# Altium PCB HUB75onQSPI.PcbDoc
Units mm, origin at the board's own origin, x right, y up, seen from the top; angles counter-clockwise.
Board outline 65.8 x 54.77 mm, 2 copper layers (Top Layer, Bottom Layer), stack 1.571 mm thick; 44 components, 37 nets, 239 pads, 38 vias.
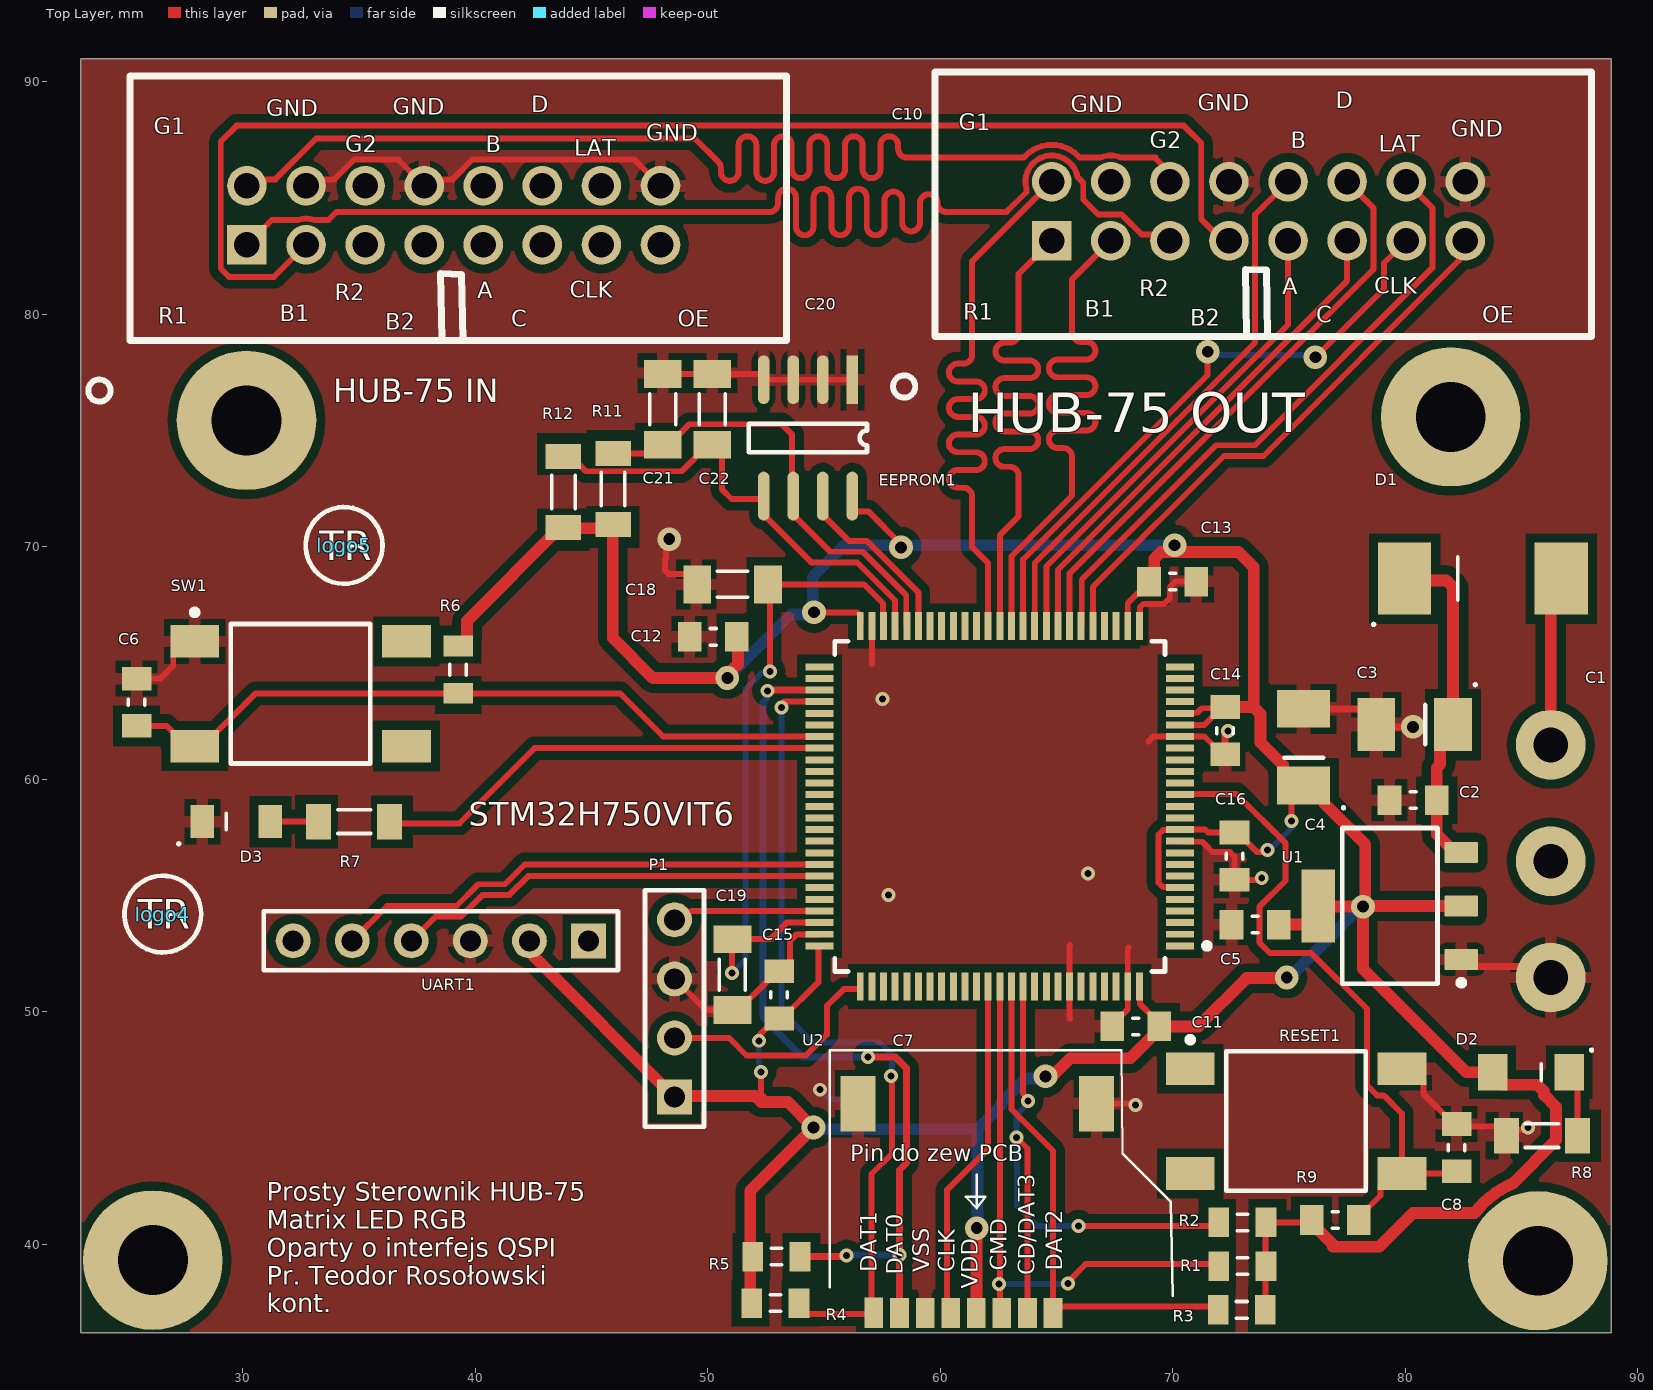
[diagram p0: Top Layer view]
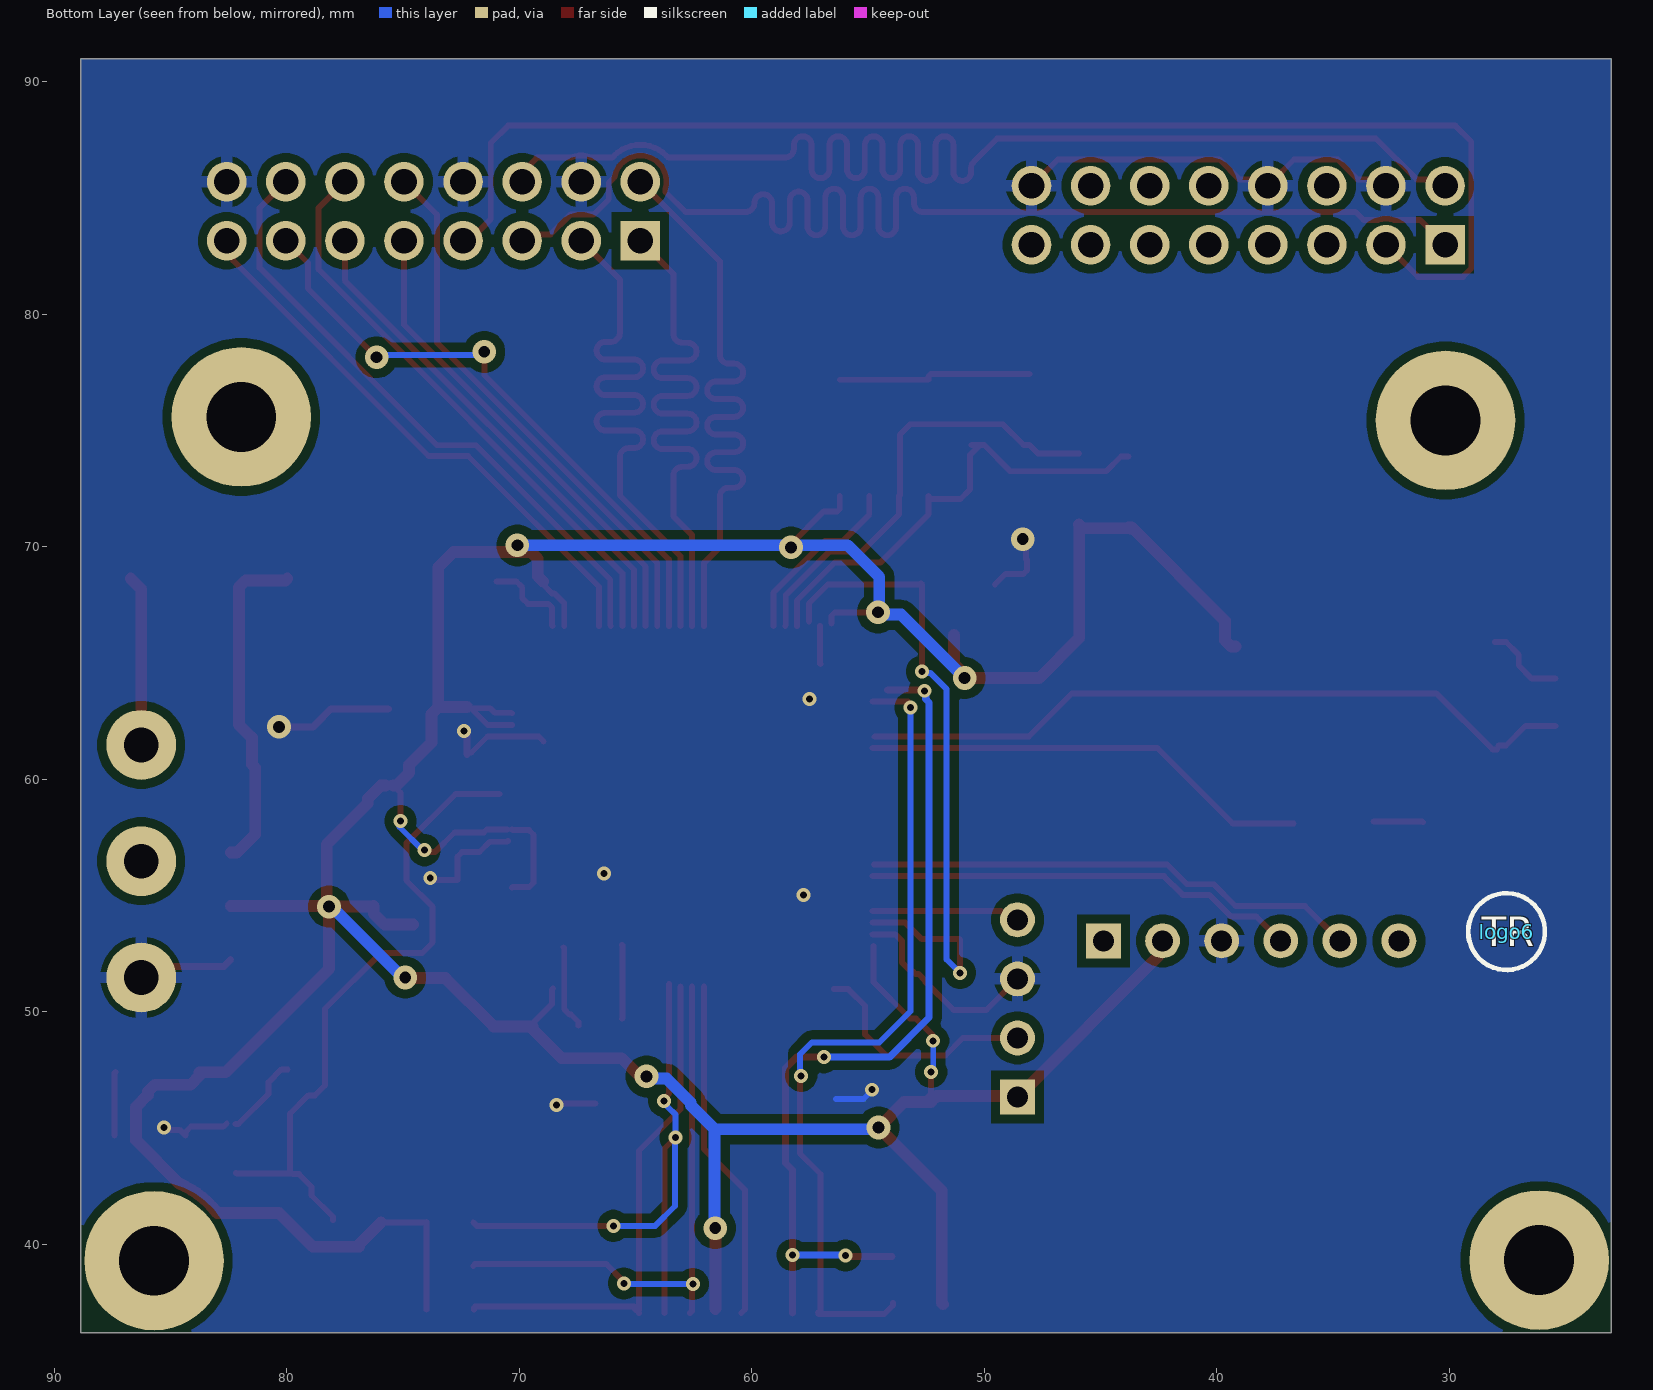
[diagram p1: Bottom Layer view, seen from below]
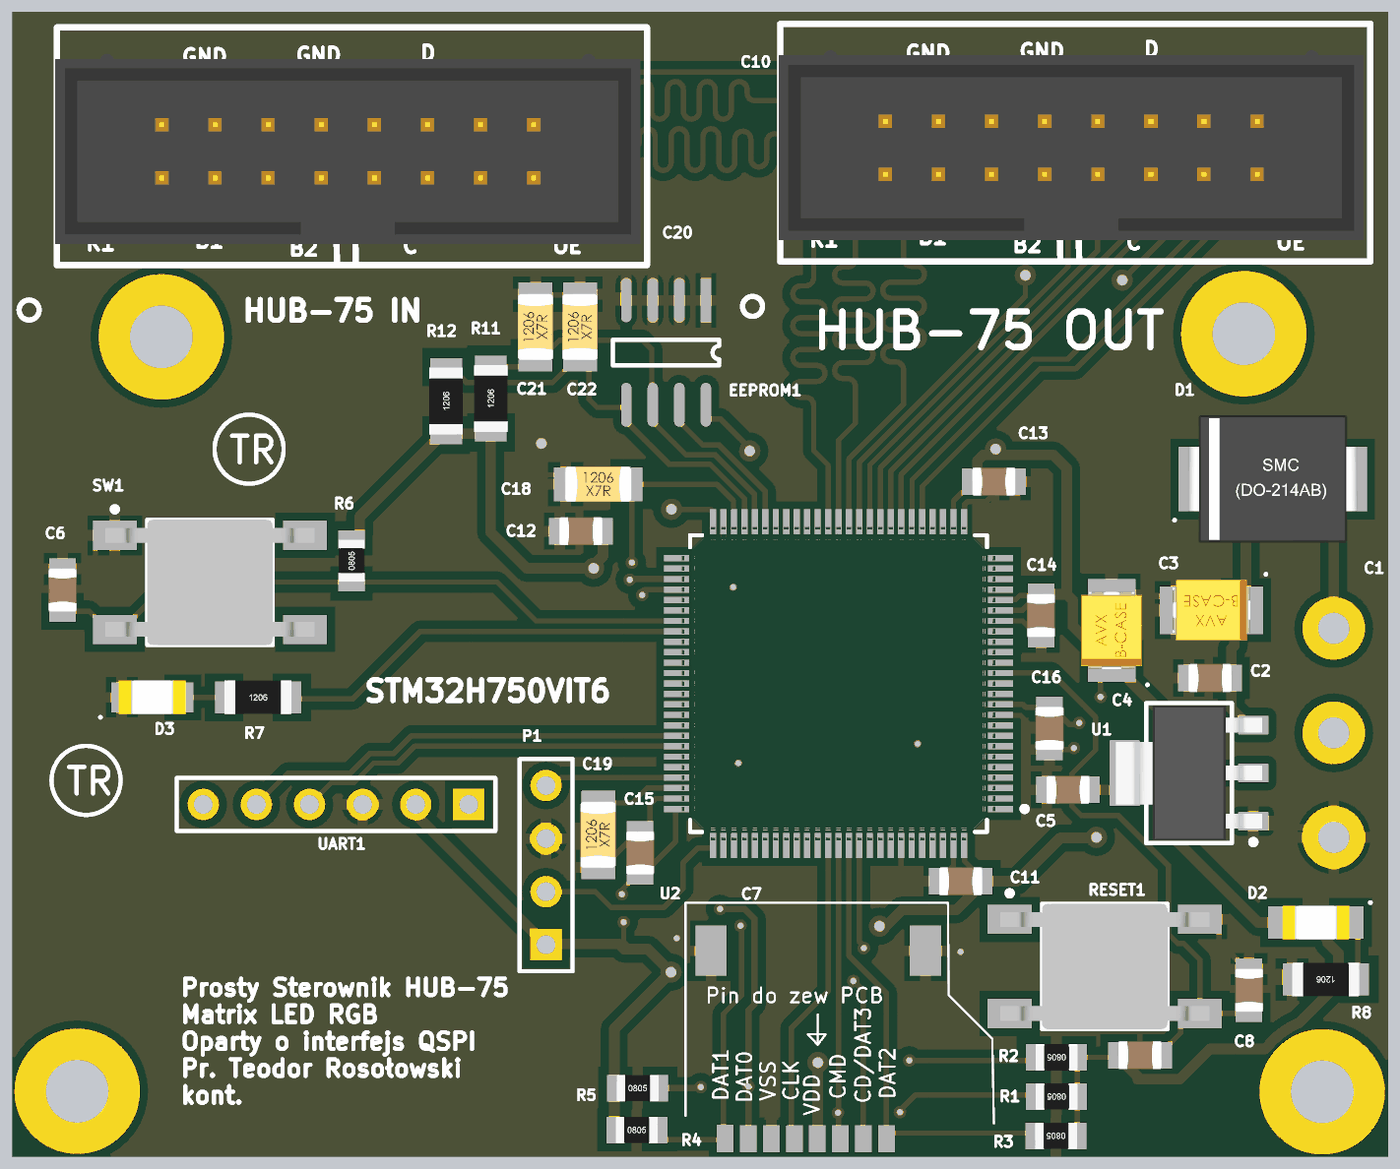
[diagram p2: 3D render of the assembled board from above, using the file's embedded part models]

## Layer stack, top to bottom
Top Solder: solder mask 0.0102, Solder Resist, Dk 3.5
Top Layer: signal copper 0.0356
Dielectric1: core 1.5, FR-4, Dk 4.8
Bottom Layer: signal copper 0.0356
Bottom Solder: solder mask 0.0102, Solder Resist, Dk 3.5

## Board outline
23.05,36.2 23.05,90.975 88.85,90.975 88.85,36.2

## Design rules (kind name [scope] priority, off if disabled: settings)
AssemblyTestPointUsage [All] p1 off:
AssemblyTestpoint [All] p1 off: testpointundercomponent=TRUE minsize=1.016 maxsize=2.54 preferedsize=1.524 minholesize=0 maxholesize=1.016 preferedholesize=0.813 testpointgrid=0.025 usegrid=TRUE gridtolerance=0 allowsidetop=TRUE allowsidebottom=TRUE
Clearance Keep-Out [OnLayer('Keep-Out Layer')] p1: gap=0.406 ignorepadtopadclearanceinfootprint=FALSE except(0: Arc-Hole Track-Hole SMDPad-Hole THPad-Hole Via-Hole Fill-Hole Poly-Hole Region-Hole Text-Hole)
Clearance VIA-PAD [IsVIA vs IsPAD] p2: gap=0.152 ignorepadtopadclearanceinfootprint=FALSE except(0: Arc-Hole Track-Hole SMDPad-Hole THPad-Hole Via-Hole Fill-Hole Poly-Hole Region-Hole Text-Hole)
Clearance Clearance_REF [HasFootprint('Designator_blacking') or HasFootprint('Designator')] p3: gap=0.203 ignorepadtopadclearanceinfootprint=FALSE except(0: Arc-Hole Track-Hole SMDPad-Hole THPad-Hole Via-Hole Fill-Hole Poly-Hole Region-Hole Text-Hole)
Clearance Clearance_REF60 [HasFootprint('Designator_60_blacking') or HasFootprint('Designator_60')] p4: gap=0.381 ignorepadtopadclearanceinfootprint=FALSE except(0: Arc-Hole Track-Hole SMDPad-Hole THPad-Hole Via-Hole Fill-Hole Poly-Hole Region-Hole Text-Hole)
Clearance Clearance_28mil [HasFootprint('SFT01')] p5: gap=0.711 ignorepadtopadclearanceinfootprint=FALSE except(0: Arc-Hole Track-Hole SMDPad-Hole THPad-Hole Via-Hole Fill-Hole Poly-Hole Region-Hole Text-Hole)
Clearance Clearance_26mil [HasFootprint('SW-2') or HasFootprint('SW-4') or HasFootprint('SW-6') or HasFootprint('SW-8')] p6: gap=0.66 ignorepadtopadclearanceinfootprint=FALSE except(0: Arc-Hole Track-Hole SMDPad-Hole THPad-Hole Via-Hole Fill-Hole Poly-Hole Region-Hole Text-Hole)
Clearance Clearance_20mil [HasFootprint('NXW-02SMD') or HasFootprint('NXW-03SMD') or HasFootprint('NXW-04SMD') or HasFootprint('NXW-05SMD') or HasFootprint('NXW-06SMD') or HasFootprint('NXW-08SMD') or HasFootprint('NXW-10SMD') or HasFootprint('NXW-12SMD') or HasFootprint('GK2X5D_SMD_(PBMTD10S)')or HasFootprint('WE-PD2SA')   or HasFootprint('LK2X10E_SMD_(BHT20S)')] p7: gap=0.508 ignorepadtopadclearanceinfootprint=FALSE except(0: Arc-Hole Track-Hole SMDPad-Hole THPad-Hole Via-Hole Fill-Hole Poly-Hole Region-Hole Text-Hole)
Clearance Clearance_7.68mil [HasFootprint('TQFP64') vs IsPad] p8: gap=0.195 ignorepadtopadclearanceinfootprint=FALSE except(0: Arc-Hole Track-Hole SMDPad-Hole THPad-Hole Via-Hole Fill-Hole Poly-Hole Region-Hole Text-Hole)
Clearance InPolygon [InPolygon] p9: gap=0.381 ignorepadtopadclearanceinfootprint=FALSE except(0: Arc-Hole Track-Hole SMDPad-Hole THPad-Hole Via-Hole Fill-Hole Poly-Hole Region-Hole Text-Hole)
Clearance [All] p10: gap=0.203 ignorepadtopadclearanceinfootprint=FALSE except(0: Arc-Hole Track-Hole SMDPad-Hole THPad-Hole Via-Hole Fill-Hole Poly-Hole Region-Hole Text-Hole; 0.15: Arc-THPad Track-THPad SMDPad-THPad THPad-THPad; 0.2: Arc-SMDPad Track-SMDPad SMDPad-SMDPad)
ComponentClearance [All] p1: gap=0 collisioncheckmode=3 verticalgap=0 showdistances=FALSE
FabricationTestPointUsage [All] p1 off: valid=0 allowmultiple=FALSE
FabricationTestpoint [All] p1 off: side=3 testpointundercomponent=TRUE minsize=1.016 maxsize=2.54 preferedsize=1.524 minholesize=0 maxholesize=1.016 preferedholesize=0.813 testpointgrid=0.025 allowsidetop=TRUE allowsidebottom=TRUE usegrid=TRUE gridtolerance=0
HoleSize HoleSize_Ramka [HasFootprint('hole_frame') or HasFootprint('hole_frame1')] p1: absolutevalues=TRUE maxlimit=3 minlimit=3 maxpercent=80.000 minpercent=20.000
HoleSize [All] p2: absolutevalues=TRUE maxlimit=5 minlimit=0.3 maxpercent=80.000 minpercent=20.000
MatchedLengths "Schematic Matched Net Lengths_1" [InNetClass('DAT_RGB_OUT')] p1: tolerance=2 checknetsindiffpair=FALSE checkdiffpairvsdiffpair=TRUE checkxsignals=TRUE checkothers=TRUE
MatchedLengths "Schematic Matched Net Lengths" [InNetClass('DAT_RGB')] p2: tolerance=2 checknetsindiffpair=FALSE checkdiffpairvsdiffpair=TRUE checkxsignals=TRUE checkothers=TRUE
MatchedLengths Lengh [InNetClass('DAT_RGB')  And  InNetClass('DAT_RGB_OUT')] p3: tolerance=2 checknetsindiffpair=FALSE checkdiffpairvsdiffpair=TRUE checkxsignals=TRUE checkothers=TRUE
MinimumSolderMaskSliver MinimumSolderMaskSliver_Ramka [HasFootprint('LOGO-05X18_so')] p1: minsoldermaskwidth=0
MinimumSolderMaskSliver MinimumSolderMaskSliver_Via-Pad [IsVia vs IsPad] p2: minsoldermaskwidth=0.508
MinimumSolderMaskSliver [All] p3: minsoldermaskwidth=0.095
PolygonConnect PolygonConnect_VIA [ISVIA] p1: connectstyle=Direct reliefconductorwidth=0.254 reliefentries=4 polygonreliefangle="90 Angle" airgapwidth=0.254
PolygonConnect PolygonConnect_30mil [HasFootprint('CE-SMD-J80_(H7,9MM)')] p2: connectstyle=Relief reliefconductorwidth=0.762 reliefentries=4 polygonreliefangle="90 Angle" airgapwidth=0.254
PolygonConnect PolygonConnect_24mil [HasFootprint('3528-SMDB') or HasFootprint('6032-SMDC') or HasFootprint('7343-SMDD')] p3: connectstyle=Relief reliefconductorwidth=0.61 reliefentries=4 polygonreliefangle="90 Angle" airgapwidth=0.254
PolygonConnect PolygonConnect_20mil [HasFootprint('0805R') or HasFootprint('0805C')or HasFootprint('1206R') or HasFootprint('1206C')] p4: connectstyle=Relief reliefconductorwidth=0.508 reliefentries=4 polygonreliefangle="90 Angle" airgapwidth=0.254
PolygonConnect PolygonConnect_16mil [HasFootprint('CF2040_V_(ZIF40-0,5MM)')] p5: connectstyle=Relief reliefconductorwidth=0.406 reliefentries=4 polygonreliefangle="90 Angle" airgapwidth=0.254
PolygonConnect PolygonConnect_14mil [HasFootprint('SOODIM-200_(TYCO,CONCRAFT 2,5V)') or HasFootprint('SOODIM-200_(TYCO,CONCRAFT 2,5V) - COLIBRI') or HasFootprint('TSSOP24') or HasFootprint('TSSOP20') or HasFootprint('TSSOP18') or HasFootprint('TSSOP16') or HasFootprint('TSSOP14') or HasFootprint('SSOP24-150-0.64') or HasFootprint('SOT-323-5')] p6: connectstyle=Relief reliefconductorwidth=0.356 reliefentries=4 polygonreliefangle="90 Angle" airgapwidth=0.254
PolygonConnect PolygonConnect_12mil [HasFootprint('CF2014_D_(ZIF14-0,5MM)') or HasFootprint('CF2040_U_(ODWROTNA NUMERACJA)') or HasFootprint('TQFP144') or HasFootprint('TQFP80') or HasFootprint('TQFP64') or HasFootprint('TQFP48') or HasFootprint('0603C') or HasFootprint('0603R') or HasFootprint('SOT-23-3') or HasFootprint('4D03')or HasFootprint('QFN16-0.65_(H1,6MM)')or HasFootprint('PLCC2') or HasFootprint('PLCC2-S')or HasFootprint('SFH5711')] p7: connectstyle=Relief reliefconductorwidth=0.305 reliefentries=4 polygonreliefangle="90 Angle" airgapwidth=0.254
PolygonConnect PolygonConnect_11mil [HasFootprint('QFN20_B&T') or HasFootprint('QFN24_B&T') or HasFootprint('QFN32_31_B&T') or HasFootprint('QFN32_34_B&T') or HasFootprint('QFN36_30x40_LT3958_B&T') or HasFootprint('QFN36_37_B&T') or HasFootprint('QFN36_44_B&T') or HasFootprint('QFN40_41_B&T') or HasFootprint('QFN40_44_B&T_1')or HasFootprint('QFN56_59_B&T')] p8: connectstyle=Relief reliefconductorwidth=0.279 reliefentries=4 polygonreliefangle="90 Angle" airgapwidth=0.254
PolygonConnect PolygonConnect_13mil [HasFootprint('QFN12-0.80_21_B&T') or HasFootprint('QFN16-0.65_21_B&T')] p9: connectstyle=Relief reliefconductorwidth=0.33 reliefentries=4 polygonreliefangle="90 Angle" airgapwidth=0.254
PolygonConnect PolygonConnect_10mil [HasFootprint('D0603') or HasFootprint('0402') or HasFootprint('D0603R') or HasFootprint('D0603G') or HasFootprint('D0603B') or HasFootprint('D0603Y') or HasFootprint('0402R') or HasFootprint('0402C')] p10: connectstyle=Relief reliefconductorwidth=0.254 reliefentries=4 polygonreliefangle="90 Angle" airgapwidth=0.254
PolygonConnect PolygonConnect_NoConnect [HasFootprint('SFT01') or HasFootprint('SW-2') or HasFootprint('SW-4') or HasFootprint('SW-6') or HasFootprint('SW-8') or HasFootprint('SOT-223') or HasFootprint('SOT-223_')] p11: connectstyle=NoConnect reliefconductorwidth=0.381 reliefentries=4 polygonreliefangle="90 Angle" airgapwidth=0.254
PolygonConnect [All] p12: connectstyle=Relief reliefconductorwidth=0.508 reliefentries=4 polygonreliefangle="90 Angle" airgapwidth=0.254
RoutingVias [All] p1: holewidth=0.508 width=1.016 viastyle="Through Hole" minholewidth=0.3 minwidth=0.6 maxholewidth=3 maxwidth=4
SilkToSilkClearance [All] p1: silktosilkclearance=0.025
SilkToSolderMaskClearance SilkscreenOverComponentPads [IsPad] p1: minsilkscreentomaskgap=0.152 clearancetoexposedcopper=TRUE
SolderMaskExpansion [All] p1: expansion=0.025 istentingtop=FALSE
Width Width_Ramka [HasFootprint('hole_frame') or HasFootprint('hole_frame1') or HasFootprint('Designator_blacking_B&T1') or HasFootprint('Designator_blacking_B&T2') or HasFootprint('Designator_blacking_B&T3') or HasFootprint('Designator_blacking_B&T4') or HasFootprint('Designator_blacking_B&T5')] p1: maxlimit=2.6 minlimit=0.254 preferedwidth=0.254
Width [All] p2: maxlimit=2.54 minlimit=0.203 preferedwidth=0.254
21 further rules are at their usual default settings.

## Classes and differential pairs
net class DAT_RGB: QSPI_CLK QSPI_D0 QSPI_D1 QSPI_D2
net class DAT_RGB_OUT: B1_OUT G1_OUT R1_OUT

## Components (designator, comment, footprint, x,y, rotation, side; value= is the part's Value field where it differs from the comment)
C1 "Złącze ARK 3Pin 5mm" ARK_3pin_5MM 86.25,61.475 r270 top
C2 "100n" 0805C 81.35,59.1 r180 top
C3 "47u-10V" 3528-SMDB 82.052,62.35 r180 top
C4 "47u-10V" 3528-SMDB 75.625,59.725 r90 top
C5 "100n" 0805C 74.558,53.75 r180 top
C6 "100n" 0805C 25.45,62.293 r90 top
C7 "Wtyk_uSD" 112K-TAA0-RA1 61.595,41.55 r0 top locked
C8 "100n" 0805C 82.2,43.143 r90 top
C10 "RGB_PANEL_CONN" RGB_MATRIX_LED_CONNECTOR 64.795,83.15 r0 top locked
C11 "100n" 0805C 69.425,49.375 r180 top
C12 "100n" 0805C 51.257,66.125 r180 top
C13 "100n" 0805C 68.975,68.5 r0 top
C14 "100n" 0805C 72.25,63.107 r270 top
C15 "100n" 0805C 53.073,49.713 r90 top
C16 "100n" 0805C 72.653,57.707 r270 top
C18 "2.2uF" 1206C 49.55,68.375 r0 top
C19 "2.2uF" 1206C 51.066,50.075 r90 top
C20 "RGB_PANEL_CONN" RGB_MATRIX_LED_CONNECTOR 30.195,82.975 r0 top locked
C21 "22p" 1206C 48.068,74.377 r90 top
C22 "22p" 1206C 50.2,74.377 r90 top
D1 "SK36" DO214AB 79.969,68.625 r0 top
D2 "n.m." D1206 87.05,47.4 r180 top
D3 "n.m." D1206_1 28.089,58.175 r0 top
EEPROM1 "EEPROM M24C16" SOP8EEPROM 56.22,77.175 r270 top
logo4 "Comment" LOGO-GT_OV 26.575,54.2 r0 top
logo5 "Comment" LOGO-GT_OV 34.371,70.051 r0 top
logo6 "Comment" LOGO-GT_OV 27.55,53.45 r180 bottom
P1 "Header 4" HDR1X4 48.575,46.335 r90 top
R1 "47k-1%" 0805R 74.007,39.07 r180 top
R2 "47k-1%" 0805R 74.007,40.95 r180 top
R3 "47k-1%" 0805R 73.982,37.19 r180 top
R4 "47k-1%" 0805R 51.9,37.475 r0 top
R5 "47k-1%" 0805R 51.943,39.475 r0 top
R6 "10k-1%" 0805R 39.275,63.693 r90 top
R7 "1k-1%" 1206R 33.277,58.175 r0 top
R8 "470R-1%" 1206R 87.398,44.675 r180 top
R9 "10k" 0805C 75.968,41.05 r0 top
R11 "3k3-1%" 1206R 45.934,70.952 r90 top
R12 "3k3-1%" 1206R 43.8,70.827 r90 top
RESET1 "FSM4JSMATR" TECO-FSM4JSMATR_V 75.3,45.3 r90 top
SW1 "FSM4JSMATR" TECO-FSM4JSMATR_V 32.5,63.675 r90 top
U1 "LM1117MP-3.3/NOPB" DCY0004A_L 79.329,54.55 r180 top
U2 "STM32H750VBT6" FP-LQFP100-1L-MFG 62.563,58.835 r180 top locked
UART1 "UART3" HDR1X6 44.88,53.05 r180 top

## Footprints (in the part's own frame and the unit in brackets; to place one, negate y for a bottom-side part, rotate by r counter-clockwise, add the part's x,y. Pads: shape width x height; smd on the part's side, far side on the other; paste and mask are expansions set on the pad)
112K-TAA0-RA1 [mm]
  rect 0.8x1.3 smd: 1(3.257,-4.5) 2(2.157,-4.5) 3(1.057,-4.5) 4(-0.043,-4.5) 5(-1.143,-4.5) 6(-2.243,-4.5) 7(-3.343,-4.5) 8(-4.45,-4.486)
  rect 1.5x2.4 smd: SH1(-5.13,4.5) SH1(5.13,4.5)
  silkscreen extent -6.35,-3.76 8.4,6.8, body extent -6.2,-3.85 8.43,6.53, height 1
0805C [mil]
  rect 40x50 smd mask+1: 1(0,0) 2(80,0)
  silkscreen extent 35,-14 45,14, body extent -1,-27 81,27, height 53
0805R [mil]
  rect 35x50 smd mask+1: 1(0,0) 2(80,0)
  silkscreen extent 31,-14 49,14, body extent 1,-25 79,25, height 23
1206C [mil]
  rect 47x64 smd mask+1: 1(0,0) 2(120,0)
  silkscreen extent 34,-22 86,22, body extent -3,-33 123,33, height 67
1206R [mil]
  rect 42x60 smd mask+1: 1(0,0) 2(120,0)
  silkscreen extent 32,-20 88,20, body extent -3,-31 123,31, height 24
3528-SMDB [mil]
  rect 64x90 smd mask+1: 1(0,0) 2(130,0)
  silkscreen extent -39,-69 47,33, body extent -8,-58 138,58, height 80
ARK_3pin_5MM [mm]
  round 3 hole 1.5: 1(0,0) 2(5,0) 3(10,0)
  body extent -2.5,-2.5 12.5,2.5, height 5
D1206 [mil]
  rect 50x62 smd mask+1: 1(0,0) 2(130,0)
  silkscreen extent -39,-39 48,14, body extent 2,-31 128,32, height 43
D1206_1 [mil]
  rect 40x56 smd mask+1: 1(7.5,0) 2(122.5,0)
  silkscreen extent -34,-39 48,14, body extent 2,-31 128,32, height 43
DCY0004A_L [mm] "SOT223, 4-Leads, Body 6.7x3.7mm, Pitch 2.3mm, IPC High Density"
  rrect11% 1.45x0.9 smd: 1(-3.075,2.3) 2(-3.075,0) 3(-3.075,-2.3)
  rrect7% 1.45x3.15 smd: 4(3.075,0)
  silkscreen extent -3.2,-3.35 2.05,3.42, body extent -3.5,-3.25 3.5,3.25, height 1.62
DO214AB [mil]
  rect 90x122 smd paste-130 mask-130: 1(0,0) 2(265,0)
  silkscreen extent -54,-79 90,37, body extent -28,-120 293,120, height 93
FP-LQFP100-1L-MFG [mm]
  rect 1.2x0.3 smd paste+0 mask+0: 1(-7.75,6) 2(-7.75,5.5) 3(-7.75,5) 4(-7.75,4.5) 5(-7.75,4) 6(-7.75,3.5) 7(-7.75,3) 8(-7.75,2.5) 9(-7.75,2) 10(-7.75,1.5) 11(-7.75,1) 12(-7.75,0.5) 13(-7.75,0) 14(-7.75,-0.5) 15(-7.75,-1) 16(-7.75,-1.5) 17(-7.75,-2) 18(-7.75,-2.5) 19(-7.75,-3) 20(-7.75,-3.5) 21(-7.75,-4) 22(-7.75,-4.5) 23(-7.75,-5) 24(-7.75,-5.5) 25(-7.75,-6) 51(7.75,-6) 52(7.75,-5.5) 53(7.75,-5) 54(7.75,-4.5) 55(7.75,-4) 56(7.75,-3.5) 57(7.75,-3) 58(7.75,-2.5) 59(7.75,-2) 60(7.75,-1.5) 61(7.75,-1) 62(7.75,-0.5) 63(7.75,0) 64(7.75,0.5) 65(7.75,1) 66(7.75,1.5) 67(7.75,2) 68(7.75,2.5) 69(7.75,3) 70(7.75,3.5) 71(7.75,4) 72(7.75,4.5) 73(7.75,5) 74(7.75,5.5) 75(7.75,6)
  rect 0.3x1.2 smd paste+0 mask+0: 26(-6,-7.75) 27(-5.5,-7.75) 28(-5,-7.75) 29(-4.5,-7.75) 30(-4,-7.75) 31(-3.5,-7.75) 32(-3,-7.75) 33(-2.5,-7.75) 34(-2,-7.75) 35(-1.5,-7.75) 36(-1,-7.75) 37(-0.5,-7.75) 38(0,-7.75) 39(0.5,-7.75) 40(1,-7.75) 41(1.5,-7.75) 42(2,-7.75) 43(2.5,-7.75) 44(3,-7.75) 45(3.5,-7.75) 46(4,-7.75) 47(4.5,-7.75) 48(5,-7.75) 49(5.5,-7.75) 50(6,-7.75) 76(6,7.75) 77(5.5,7.75) 78(5,7.75) 79(4.5,7.75) 80(4,7.75) 81(3.5,7.75) 82(3,7.75) 83(2.5,7.75) 84(2,7.75) 85(1.5,7.75) 86(1,7.75) 87(0.5,7.75) 88(0,7.75) 89(-0.5,7.75) 90(-1,7.75) 91(-1.5,7.75) 92(-2,7.75) 93(-2.5,7.75) 94(-3,7.75) 95(-3.5,7.75) 96(-4,7.75) 97(-4.5,7.75) 98(-5,7.75) 99(-5.5,7.75) 100(-6,7.75)
  silkscreen extent -9.03,-7.1 7.1,7.1, body extent -8.45,-8.45 8.45,8.45, height 0.25
HDR1X4 [mm] "Connector; Header; 4 Position"
  rect 1.5x1.5 hole 0.9: 1(0,0)
  round 1.5 hole 0.9: 2(2.54,0) 3(5.08,0) 4(7.62,0)
  silkscreen extent -1.27,-1.27 8.89,1.27
HDR1X6 [mm] "Connector; Header; 6 Position"
  rect 1.5x1.5 hole 0.9: 1(0,0)
  round 1.5 hole 0.9: 2(2.54,0) 3(5.08,0) 4(7.62,0) 5(10.16,0) 6(12.7,0)
  silkscreen extent -1.27,-1.27 13.97,1.27
LOGO-GT_OV [mm]
  silkscreen extent -1.65,-1.65 1.65,1.65
RGB_MATRIX_LED_CONNECTOR [mm]
  rect 1.7x1.7 hole 1.1 paste+0.1 mask+0.05: 1(0,0)
  round 1.7 hole 1.1 paste+0.1 mask+0.05: 2(2.54,0) 3(5.08,0) 4(7.62,0) 5(10.16,0) 6(12.7,0) 7(15.24,0) 8(17.78,0) 9(17.78,2.54) 10(15.24,2.54) 11(12.7,2.54) 12(10.16,2.54) 13(7.62,2.54) 14(5.08,2.54) 15(2.54,2.54) 16(0,2.54)
  silkscreen extent -6.82,-6.74 23.2,7.26, body extent -5.09,-3.1 22.89,6, height 9.12
SOP8EEPROM [mm]
  rect 2.1x0.5 smd: 1(0,0)
  oval 2.1x0.5 smd: 2(0,-1.27) 3(0,-2.54) 4(0,-3.81) 5(5,-3.81) 6(5,-2.54) 7(5,-1.27) 8(5,0)
  silkscreen extent 1.89,-4.44 3.12,0.64
TECO-FSM4JSMATR_V [mm] "SMD, 4-Leads, Body 6x6mm, Pitch 4.5mm"
  rect 1.4x2.1 smd: 1(2.25,4.55) 2(2.25,-4.55) 3(-2.25,4.55) 4(-2.25,-4.55)
  silkscreen extent -3,-3 3.62,4.67, body extent -3,-5 3,5, height 5.08

## Part data
C2 C5 C6: library part "100n  0805", "Kond. ceramiczny X7R  50V  10%", Indeks=5566, Nazwa=100n
C3 C4: library part "47u-10V  3528", "Kond. tantalowy  B  10V  20%", Indeks=4032, Nazwa=47u-10V
C7: library part 112K-TAA0-RA1
C8: library part KOND, "Kondensator"
C10 C20: library part Connector_MATRIX_LED_RGB, "Pamietac o tym aby zrobic jakies zworki na to zeby te wyjscia polaczyc z wejsciami to tam wiadomix 2 takie connectory potrzebne beda / Do tego warto zwrocic uwage ze ku**y sie krzyzuja więc to nie jest tak prosto połączyć"
C11 C12 C13 C14 C15 C16: library part "10n  0805", "Kond. ceramiczny X7R  50V  10%", Nazwa=10n
C18 C19: library part Cap_2.2uF_X7R_10%_1206, "Capacitor,2.2uF,16V, X7R,10%,1206,YAGEO", Manuf_1=YAGEO, Manuf_2=KEMET, Manuf_Part_1=CC1206KKX7R7BB225, Manuf_Part_2=C1206C225K4RAC, ECCN_US/EU=n/a, Order=CC1206KKX7R7BB225, Revision="July-2002: Re-released for DXP Platform."
C21 C22: library part "22p  1206", "Kond. ceramiczny NP0  50V", Nazwa=22p
D1: library part "SK36  DO214AB", "Dioda Schottky  60V  IF=3A  VF=0,75V", Index=9145, Nazwa=SK36
D2: library part "n.m.  D1206", "Dioda LED", Index=-, Nazwa=n.m.
D3: library part "n.m.  D1206_1", "Dioda LED HongliTronic", Index=-, Nazwa=n.m.
P1: "Header, 4-Pin", LatestRevisionDate=17-Jul-2002, LatestRevisionNote="Re-released for DXP Platform.", Publisher="Altium Limited"
R1 R2 R3 R4 R5: library part "47k-1%  0805", "Rezystor 0,125W", Nazwa=47k-1%
R6: library part "10k-1%  0805", "Rezystor 0,125W", Nazwa=10k-1%
R7: library part "1k-1%  1206", "Rezystor 0,25W", Nazwa=1k-1%
R8: library part "470R-1%  1206", "Rezystor 0,25W", Nazwa=470R-1%
R9: library part RES2, "Rezystor"
R11 R12: library part "3k3-1%  1206", "Rezystor 0,25W", Nazwa=3k3-1%
RESET1 SW1: library part CMP-2000-07486-1, "Micro Miniature Push Button Switch FSM JSM, 50 mA, -35 to 85 degC, 4-Pin SMD, RoHS, Tape and Reel", Capacitance=0f, Case\/Package=SMD/SMT, Contact Current Rating=50mA, Contact Resistance=100mOhm, Manufacturer="TE Connectivity", Max Operating Temperature=85degC, Max Voltage Rating (DC)=12V, Min Operating Temperature=-35degC, Operating Force=160gf, Package Description="4-Pin Surface Mount Device, Body 6 x 6 mm, Pitch 4.5 mm", Package Quantity=1200, Voltage Rating (DC)=24V, Actuator Length=0.055inch, Actuator Material=Polyamide, Contact Material=CopperAlloy, Contact Plating=Silver, Current Rating=50mA, Datasheet URL=http://www.te.com/commerce/DocumentDelivery/DDEController?Action=showdoc&DocId=Customer+Drawing%7F2-1437565-7%7FV%7Fpdf%7FEnglish%7FENG_CD_2-1437565-7_V.pdf%7F4-1437565-2, Datasheet Version="Rev. V, 02/2015", Electrical Life=100000Cycles, Illumination Type=Illuminated, Manufacturer URL=http://www.te.com/, Mechanical Life=100000Cycles, Mount=SurfaceMount, Mounting Technology=SurfaceMount, Orientation=Straight, Package Reference=FSM4JSMATR, Packaging=TapeandReel, REACH SVHC=Unknown, RoHSCompliant=true, Switch Travel=0.25mm, Termination=GullWing, Throw Configuration=SPST
U1: library part CMP-0062-01638-4, "800mA Low-Dropout Linear Regulator, 4-pin SOT-223, Pb-Free", Manufacturer="Texas Instruments", PackageTopMarking=XYTT*N05A, PowerWise=N, Code_IPC=SOT223-4, Code_JEDEC=TO-261-AA, ComponentLink1Description="Datasheet URL", ComponentLink1URL=http://www.ti.com/general/docs/lit/getliterature.tsp?genericPartNumber=LM1117-N&fileType=pdf, CompType="LDO IC", High-Reliability=Y, PackageDescription="Molded SOT-223, 6.50 x 3.56 x 1.6mm Body, 4 Lead, 2.3mm Pitch", PackageReference=DCY0004A, PartNumber=LM1117MP-3.3/NOPB, PinCount=4, RoHS=Y
U2: library part CMP-12105-000017-1, "IC MCU 32BIT 128KB FLASH 100LQFP", Ambient Temperature Range High=+85°C, Ambient Temperature Range Low=-40°C, Frequency=480MHz, Manufacturer=STMicroelectronics, Max Junction Temp=+125°C, Max Supply Voltage=3.6V, Min Supply Voltage=1.62V, Package=LQFP100-1L, Temperature="-40°C to +125°C", Automotive=No, Category=IC, ComponentLink2Description=Datasheet, ComponentLink2URL=https://www.st.com/resource/en/datasheet/stm32h750vb.pdf, Core Architecture="ARM Cortex-M7", Data Bus Width=32bits, Device Class L1="Integrated Circuits (ICs)", Device Class L2="Embedded Processors and Controllers", Device Class L3=Microcontrollers, Digikey Description="IC MCU 32BIT 128KB FLASH 100LQFP", Height=1.6mm, Interface=I2C,SPI,UART,USART,CAN,USB,LIN,IrDA,Ethernet,I2S,Other, Lead Free=Yes, Manufacturer Part Number=STM32H750VBT6, Memory Size=128KBytes, Memory Type=FLASH, Mouser Description="MCU 32-Bit STM32H750VB ARM Cortex M7 RISC 128KB Flash 1.8V/2.5V/3.3V 100-Pin LQFP Tray", Number Of A/D Converters=3, Number Of Adc Channels=36, Number Of Cores=1, Number Of Ethernet Channels=1, Number Of I2C Channels=4, Number Of I/Os=82, Number Of Pwm Channels=42, Number Of Spi Channels=6, Number Of Timers/Counters=20, Number Of Uart Channels=9, Number Of Usb Channels=2, Octopart=https://octopart.com/stm32h750vbt6-stmicroelectronics-94048547, Ram Size=1MBytes, RoHS=TRUE, Standoff Height=0.05mm, Temperature Range High=+125°C, Temperature Range Low=-40°C
UART1: library part "Header 6", "Header, 6-Pin", LatestRevisionDate=17-Jul-2002, LatestRevisionNote="Re-released for DXP Platform.", Publisher="Altium Limited"

## Free pads (board coordinates)
  round 6 hole 3: 20(26.15,39.325) 21(81.95,75.575) 22(30.175,75.425) 23(85.7,39.3)

## Via types
v1: diameter 0.6, hole 0.3, Top Layer to Bottom Layer, tented both sides, 25 vias
v2: diameter 1.016, hole 0.508, Top Layer to Bottom Layer, tented both sides, 13 vias

## Nets (pads, with @x,y where several pads share a name; then routed paths per layer and width w, separated by ;. In a path a pad name is that pad's centre, name@x,y a point inside that pad or via, vN(x,y) a via of type N, cw(c..) or ccw(c..) an arc to the next point about the centre after c; other vN are vias at no path point)
B1_OUT: C10.4 C20.2 | length 57.4
  Top Layer w0.254: C20.2 31.36,81.6 29.424,81.6 29.068,81.956 29.068,87.418 29.75,88.1 70.476,88.1 71.225,87.351 71.225,84.075 72.15,83.15 C10.4
EEPROM_WC: EEPROM1.7 U2.45 | length 7.7
  Top Layer w0.254: EEPROM1.7 54.95,71.375 56.075,70.25 56.846,70.25 59.063,68.033 U2.45
G1_OUT: C10.14 C20.16 | length 56.7
  Top Layer w0.254: C20.16 30.471,85.792 31.418,85.792 33.176,87.55 49.3,87.55 49.45,87.55 50.458,86.542 cw(c50.189,86.272) 50.57,86.272 50.57,86.106 ccw(c50.951,86.106) 51.332,86.106 51.332,87.262 cw(c51.713,87.262) 52.094,87.262 52.094,86.106 ccw(c52.475,86.106) 52.856,86.106 52.856,87.262 cw(c53.237,87.262) 53.618,87.262 53.618,86.224 ccw(c53.999,86.224) 54.38,86.224 54.38,87.262 cw(c54.761,87.262) 55.142,87.262 55.142,86.224 ccw(c55.523,86.224) 55.904,86.224 55.904,87.262 cw(c56.285,87.262) 56.666,87.262 56.666,86.22 ccw(c57.047,86.22) 57.428,86.22 57.428,87.262 cw(c57.809,87.262) 58.19,87.262 58.19,87.106 ccw(c58.571,87.106) 58.571,86.725 59.175,86.725 59.75,86.725 63.59,86.725 63.664,86.799 cw(c64.795,85.69) 65.926,86.799 66,86.725 66.889,86.725 cw(c67.335,85.69) 67.781,86.725 69.255,86.725 69.255,86.702 69.875,86.081 C10.14
GND: C1.3 C2.2 C3.2 C4.2 C5.2 C6.2 C7.6 C7.SH1 C8.2 C10.9 C10.13 C10.15 C11.2 C12.2 C13.2 C14.2 C15.2 C16.2 C18.1 C19.1 C20.9 C20.13 C20.15 C21.2 C22.2 D3.1 EEPROM1.1 EEPROM1.2 EEPROM1.3 EEPROM1.4 P1.3 R8.2 RESET1.2 SW1.1 U1.1 U2.10 U2.19 U2.26 U2.49 U2.74 U2.94 U2.99 UART1.3 | length 81.2
  Top Layer w0.254: C6.2 26.466,64.325 27.027,64.886 27.027,65.352 27.575,65.9 SW1.1@28.05,65.9 ; C20.15 33.011,85.792 33.958,85.792 34.808,86.642 36.688,86.642 37.6,85.73 C20.13@37.6,85.725 ; C20.13 38.091,85.792 39.038,85.792 39.888,86.642 46.848,86.642 47.79,85.7 C20.9@47.875,85.7 ; C21.2 C22.2 ; v2(48.35,70.325) 48.204,70.179 48.204,69.465 48.175,69.436 48.175,68.974 48.324,68.825 49.1,68.825 C18.1 ; P1.3@48.55,51.45 48.55,51.44 P1.3 49.915,50.075 C19.1 51.32,50.075 52.565,51.32 52.565,51.364 52.826,51.625 C15.2@52.95,51.625 ; C22.2@50.202,77.425 52.296,77.425 52.41,77.311 EEPROM1.4 EEPROM1.3 EEPROM1.2 EEPROM1.1 ; C15.2 53.169,51.745 53.55,52.126 53.55,53.05 53.832,53.332 54.81,53.332 U2.74 ; 57.05,64.95 57.063,64.963 U2.49 ; v1@57.513,63.482 57.513,63.462 v1(57.525,63.45) ; 65.575,49.7 65.563,49.712 U2.94 65.563,52.863 65.575,52.875 ; C7.SH1@66.725,46.05 68.35,46.05 v1(68.4,46) ; C11.2@67.45,49.4 67.45,49.559 67.774,49.883 67.842,49.883 68.063,50.104 U2.99 68.063,52.738 68.1,52.775 ; U2.26 68.586,66.608 68.586,67.386 68.735,67.535 69.615,67.535 69.868,67.788 69.868,68.25 70.118,68.5 C13.2@70.975,68.5 ; 68.95,61.625 69.16,61.835 U2.19 71.363,61.835 72.048,61.15 C14.2@72.125,61.15 ; U2.10@70.475,57.35 70.513,57.312 71.267,57.312 71.707,56.872 72.453,56.872 72.653,56.672 C16.2 73.75,55.675 v1(73.825,55.75) ; RESET1.2@79.95,47.525 80.225,47.525 80.773,46.977 80.773,46.475 82.073,45.175 C8.2 ; C8.2@82.575,45.2 82.708,45.067 84.108,45.067 84.35,44.825 R8.2 84.6,44.925 85.175,44.925 v1(85.275,45.025)
  Top Layer w0.305: C14.2 72.25,61.9 72.375,62.025 v1(72.375,62.075) ; C4.2 78.09,63.027 78.75,62.367 C3.2 78.85,62.25 v2(80.325,62.25) ; U1.1 82.702,51.952 85.773,51.952 C1.3
  Bottom Layer w0.254: v1(54.825,46.65) 54.825,46.625 55.2,46.25 56.375,46.25 ; v1@66.35,55.925 v1(66.35,55.95)
  other v1: 57.775,55.025
I2C2_SCL: C21.1 EEPROM1.6 R11.2 U2.46 | length 19.5
  Top Layer w0.254: R11.2 47.691,74 C21.1 48.322,74.377 49.208,75.263 53.187,75.263 53.633,74.817 53.633,72.222 EEPROM1.6 53.68,71.375 55.273,69.782 56.668,69.782 58.54,67.91 58.54,66.608 U2.46
I2C2_SDA: C22.1 EEPROM1.5 R12.2 U2.47 | length 20.7
  Top Layer w0.254: R12.2 44.13,73.875 44.764,73.241 48.886,73.241 50.02,74.375 C22.1@50.2,74.375 ; C22.1@50.55,74.375 C22.1@50.2,74.375 ; EEPROM1.5 EEPROM1.5@52.41,72.164 ; U2.47 58.063,67.687 56.425,69.325 54.46,69.325 52.41,71.375 EEPROM1.5@52.41,72.164 ; C22.1@50.2,74.375 50.2,74.354 50.625,73.929 50.625,72.45 51.025,72.05 52.296,72.05 EEPROM1.5@52.41,72.164
LATCH: C10.10 U2.31 | length 26.8
  Top Layer w0.254: U2.31 66.086,66.608 66.086,68.586 71.857,74.357 73.532,74.357 81.162,81.987 81.162,84.563 C10.10
Line_A: C10.5 U2.34 | length 20.9
  Top Layer w0.254: U2.34 64.563,69.149 74.955,79.541 C10.5
Line_B: C10.12 U2.35 | length 23.6
  Top Layer w0.254: U2.35 64.063,69.296 73.542,78.774 73.542,84.277 C10.12
Line_C: C10.6 U2.33 | length 21.7
  Top Layer w0.254: U2.33 65.063,69.003 77.495,81.435 C10.6
Line_D: C10.11 U2.32 | length 25
  Top Layer w0.254: U2.32 65.563,68.857 78.622,81.916 78.622,84.563 C10.11
NetD2_1: D2.1 R8.1 | length 2.8
  Top Layer w0.254: D2.1@87.35,47.425 87.398,47.377 R8.1
NetD3_2: D3.2 R7.1 | length 2.1
  Top Layer w0.254: D3.2@31.15,58.15 31.175,58.175 D3.2 R7.1
PWM_OE: C10.8 U2.30 | length 24.2
  Top Layer w0.254: U2.30 66.563,68.263 72.2,73.9 73.9,73.9 82.298,82.298 82.298,82.873 C10.8
QSPI_CLK: C10.7 U2.36 | length 26.4
  Top Layer w0.254: U2.36 63.563,69.442 71.5,77.379 v2(71.5,78.375) ; v2(76.132,78.143) 79.079,81.089 79.079,82.194 C10.7
  Bottom Layer w0.254: v2(71.5,78.375) 71.637,78.237 76.037,78.237 v2(76.132,78.143)
QSPI_D0: C10.2 U2.37 | length 28
  Top Layer w0.254: U2.37 63.063,69.588 65.675,72.2 65.675,73.725 65.675,73.852 ccw(c65.294,73.852) 65.294,74.233 65.056,74.233 cw(c65.056,74.614) 65.056,74.995 66.294,74.995 ccw(c66.294,75.376) 66.294,75.757 65.056,75.757 cw(c65.056,76.138) 65.056,76.519 66.294,76.519 ccw(c66.294,76.9) 66.294,77.281 65.056,77.281 cw(c65.056,77.662) 65.056,78.043 66.294,78.043 ccw(c66.294,78.424) 66.294,78.805 66.056,78.805 cw(c66.056,79.186) 65.675,79.186 65.675,80.2 65.675,81.35 65.675,81.49 C10.2
QSPI_D1: C10.1 U2.38 | length 27.9
  Top Layer w0.254: U2.38 62.563,70.488 63.375,71.3 63.375,72.925 63.375,73.052 ccw(c62.994,73.052) 62.994,73.433 62.756,73.433 cw(c62.756,73.814) 62.756,74.195 63.837,74.195 ccw(c63.837,74.576) 63.837,74.957 62.756,74.957 cw(c62.756,75.338) 62.756,75.719 63.837,75.719 ccw(c63.837,76.1) 63.837,76.481 62.756,76.481 cw(c62.756,76.862) 62.756,77.243 63.837,77.243 ccw(c63.837,77.624) 63.837,78.005 62.756,78.005 cw(c62.756,78.386) 62.756,78.767 62.994,78.767 ccw(c62.994,79.148) 63.375,79.148 63.375,80.025 63.375,80.725 63.375,81.73 C10.1
QSPI_D2: C10.16 U2.39 | length 29.4
  Top Layer w0.254: U2.39 62.063,69.287 61.375,69.975 61.375,70.15 61.375,72.025 61.375,72.152 ccw(c60.994,72.152) 60.994,72.533 60.756,72.533 cw(c60.756,72.914) 60.756,73.295 61.537,73.295 ccw(c61.537,73.676) 61.537,74.057 60.756,74.057 cw(c60.756,74.438) 60.756,74.819 61.537,74.819 ccw(c61.537,75.2) 61.537,75.581 60.756,75.581 cw(c60.756,75.962) 60.756,76.343 61.537,76.343 ccw(c61.537,76.724) 61.537,77.105 60.756,77.105 cw(c60.756,77.486) 60.756,77.867 60.994,77.867 ccw(c60.994,78.248) 61.375,78.248 61.375,78.775 61.375,79.4 61.375,82.27 C10.16
QSPI_NCS: U2.79
R1_OUT: C10.3 C20.1 | length 57.5
  Top Layer w0.254: C20.1 31.27,84.05 32.396,84.05 cw(c32.735,82.975) 33.073,84.05 33.7,84.05 34.038,84.388 52.525,84.388 52.652,84.388 ccw(c52.652,84.769) 53.033,84.769 53.033,85.007 cw(c53.414,85.007) 53.795,85.007 53.795,83.769 ccw(c54.176,83.769) 54.557,83.769 54.557,85.007 cw(c54.938,85.007) 55.319,85.007 55.319,83.769 ccw(c55.7,83.769) 56.081,83.769 56.081,85.007 cw(c56.462,85.007) 56.843,85.007 56.843,83.769 ccw(c57.224,83.769) 57.605,83.769 57.605,84.887 cw(c57.986,84.887) 58.367,84.887 58.367,83.936 ccw(c58.748,83.936) 59.129,83.936 59.129,84.769 cw(c59.51,84.769) 59.891,84.769 ccw(c60.272,84.769) 60.272,84.388 60.95,84.388 62.847,84.388 63.709,85.25 63.709,85.356 63.709,85.388 cw(c64.795,85.69) 65.86,86.059 cw(c64.795,85.69) 65.903,85.897 66.006,85.794 66.152,85.648 66.152,84.923 66.798,84.277 67.802,84.277 67.876,84.203 68.652,83.427 69.598,83.427 C10.3
RESET: C8.1 R9.2 RESET1.4 U2.14 | length 28.5
  Top Layer w0.254: U2.14@70.85,59.358 72.742,59.358 74.85,57.25 74.85,55.647 73.723,54.52 73.723,52.98 74.178,52.525 75.95,52.525 78.35,50.125 78.35,46.838 78.78,46.407 79.068,46.407 79.85,45.625 RESET1.4 82.15,43.05 C8.1@82.175,43.075 ; R9.2 78,41.177 78.927,42.104 78.927,42.477 79.475,43.025 RESET1.4@79.75,43.025
SWCLK: P1.2 U2.76 | length 10.1
  Top Layer w0.254: P1.2 50.925,48.875 51.675,48.125 54.225,48.125 55.125,49.025 55.125,50.25 55.85,50.975 U2.76@56.475,50.975
SWDIO: P1.4 U2.72 | length 6.4
  Top Layer w0.254: P1.4@48.55,53.975 48.932,53.975 49.292,54.335 U2.72
U_B1: C6.1 R6.1 SW1.3 U2.57 | length 31.3
  Top Layer w0.254: C6.1 26.732,62.293 27.575,61.45 SW1.3@27.9,61.45 ; SW1.3@27.95,61.275 28.15,61.275 30.568,63.693 R6.1 46.232,63.693 48.09,61.835 54.715,61.835 U2.57@54.725,61.825
U_LED1: R7.2 U2.58 | length 19.5
  Top Layer w0.254: R7.2@36.7,58.1 39.325,58.1 42.56,61.335 U2.58
USART_RX: U2.69 UART1.4 | length 18.7
  Top Layer w0.254: UART1.4 38.303,54.093 39.391,54.093 40.326,55.029 41.479,55.029 42.285,55.835 U2.69@54.81,55.835
USART_TX: U2.68 UART1.5 | length 21.4
  Top Layer w0.254: UART1.5 36.22,54.55 39.201,54.55 40.137,55.486 41.289,55.486 42.139,56.335 54.74,56.335 U2.68@54.75,56.325
uSD_CLK: C7.5 U2.87 | length 14.8
  Top Layer w0.254: C7.5 60.3,37.202 60.3,42.35 62.063,44.113 U2.87
uSD_CMD: C7.3 R1.2 U2.88 | length 23.9
  Top Layer w0.254: U2.88 62.563,37.138 C7.3 ; v1(65.5,38.325) 65.5,38.4 66.25,39.15 71.895,39.15 R1.2
  Bottom Layer w0.254: v1(62.538,38.296) 65.471,38.296 v1(65.5,38.325)
uSD_D0: C7.7 R5.2 U2.53 | length 37.8
  Top Layer w0.305: v1(52.578,63.803) 52.612,63.837 54.155,63.837 ; R5.2 55.725,39.475 55.775,39.525 v1(55.975,39.525) ; v1(56.9,48.05) 58.075,48.05 58.55,47.575 58.55,43.5 58.252,43.202 C7.7
  Bottom Layer w0.305: v1(52.578,63.803) 52.521,63.747 52.521,63.446 52.375,63.3 52.375,49.75 54.075,48.05 v1(56.9,48.05) ; v1(55.975,39.525) 56,39.55 v1(58.25,39.55)
uSD_D1: C7.8 R4.2 U2.54 | length 35.4
  Top Layer w0.254: v1(53.175,63.075) 53.175,63.225 53.285,63.335 U2.54 ; R4.2 53.932,37.381 54.313,37 C7.8@57.125,37 ; C7.8 57.05,37.159 57.05,43.025 57.925,43.9 57.925,47.2 v1(57.875,47.25)
  Bottom Layer w0.254: v1(53.175,63.075) 53.175,50.025 54.52,48.68 57.42,48.68 57.925,48.175 57.925,47.3 v1(57.875,47.25)
uSD_D2: C7.1 R3.2 U2.89 | length 22.3
  Top Layer w0.254: U2.89 63.063,45.812 64.852,44.023 C7.1@64.852,37.15 ; C7.1 65.05,37.248 C7.1@65.05,37.325 ; C7.1@64.875,37.15 C7.1@65.05,37.325 ; R3.2 71.95,37.27 71.895,37.325 C7.1@65.05,37.325
uSD_D3: C7.2 R2.2 U2.90 | length 26.5
  Top Layer w0.254: v1(63.275,44.6) 63.752,44.123 C7.2 ; U2.90@63.55,51.2 63.563,51.187 U2.90 63.563,46.481 63.775,46.269 v1(63.775,46.175) ; v1(65.95,40.8) 71.825,40.8 R2.2
  Bottom Layer w0.254: v1(63.275,44.6) 63.275,45.575 63.625,45.925 63.625,45.931 63.775,46.081 v1(63.775,46.175) ; v1@63.3,44.425 63.3,41.65 64.15,40.8 v1(65.95,40.8)
VCAP: C18.2 C19.2 U2.48 U2.73 | length 29.1
  Top Layer w0.254: v1(51.05,51.675) 51.05,53.107 C19.2 52.69,53.123 53.402,53.835 U2.73 ; v1(52.678,64.628) C18.2@52.678,68.375 ; C18.2@52.725,68.425 52.678,68.378 C18.2@52.678,68.375 ; U2.48@57.54,66.775 57.54,67.564 56.729,68.375 C18.2@52.678,68.375
  Bottom Layer w0.254: v1(51.05,51.675) 51.625,52.25 51.625,63.875 52.312,64.562 52.611,64.562 v1(52.678,64.628)
VCC: C4.1 C5.1 C7.4 C11.1 C12.1 C13.1 C14.1 C15.1 C16.1 D2.2 EEPROM1.8 P1.1 R1.1 R2.1 R3.1 R4.1 R5.1 R6.2 R9.1 R11.1 R12.1 U1.2 U1.4 U2.6 U2.11 U2.20 U2.21 U2.27 U2.50 U2.75 U2.100 UART1.2 | length 204
  Top Layer w0.254: v1(52.2,48.755) 52.225,48.78 52.225,48.992 52.946,49.713 C15.1 53.2,49.713 54.775,51.288 U2.75@54.775,52.825 ; v1(52.287,47.416) 52.287,46.488 52.6,46.175 ; v2(54.575,67.175) 56.423,67.175 56.575,67.023 U2.50@56.575,66.7 ; EEPROM1.8 56.22,71.616 56.334,71.502 56.923,71.502 58.316,70.109 v2(58.316,69.966) ; U2.27 68.063,67.566 68.489,67.992 68.594,67.992 C13.1@68.95,68.348 ; U2.100@68.55,51 68.586,50.964 68.586,50.341 C11.1@69.35,49.577 ; U2.6 70.29,55.358 69.578,55.358 69.386,55.55 69.386,57.62 69.578,57.812 70.29,57.812 U2.11 ; U2.20 71.351,62.335 C14.1@71.966,62.95 ; U2.21 70.336,62.858 71.049,62.858 71.241,63.05 C14.1@72.325,63.05 ; U2.11@70.5,57.85 70.515,57.835 71.39,57.835 71.518,57.707 C16.1 72.78,57.707 73.612,56.875 74,56.875 v1(74.075,56.95) ; R3.1 R2.1@73.982,40.957 ; R2.1 R9.1@75.941,40.95 ; v1(75.1,58.2) 75.1,59.425 75.4,59.725 C4.1@75.525,59.85
  Top Layer w0.508: R6.2@39.2,65.7 39.377,65.7 39.656,65.979 39.656,66.81 43.673,70.827 R12.1 ; UART1.2@42.3,53.125 42.53,52.895 42.53,52.38 P1.1 ; R12.1@43.65,70.75 43.688,70.788 45.77,70.788 R11.1 ; R11.1@45.925,70.75 45.925,66.075 47.65,64.35 v2(50.85,64.35) 50.85,64.487 51.3,64.937 C12.1@51.3,66.2 ; P1.1@48.7,46.375 52.05,46.375 52.3,46.125 53.45,46.125 v2(54.55,45.025) 51.837,42.312 51.837,37.487 R4.1@51.775,37.425 ; C7.4@61.575,37.227 61.563,37.238 61.563,40.688 v2(61.575,40.7) ; v2(64.525,47.225) 64.825,47.225 65.6,48 68.177,48 69.425,49.248 C11.1 71.1,49.375 73.175,51.45 74.875,51.45 v2(74.9,51.475) ; C13.1 69.202,68.727 69.202,69.477 69.5,69.775 v2@69.9,69.775 ; v2(70.08,70.056) 69.9,69.876 v2@69.9,69.775 ; C14.1@72.25,63.1 73.477,63.1 ; C5.1 75.783,53.75 76.254,54.221 U1.4 76.279,54.525 v2(78.175,54.525) ; C4.1@75.4,59.725 75.295,59.725 74.736,60.284 74.736,60.614 73.775,61.575 73.775,62.802 73.477,63.1 ; C4.1@75.75,59.725 75.955,59.725 76.514,59.166 76.514,58.961 78.275,57.2 v2@78.275,54.55 ; R9.1@75.941,40.95 76.875,40.016 76.875,39.9 78.875,39.9 80.325,41.35 82.983,41.35 cw(c86.128,38.977) 84.615,42.615 86.475,44.475 86.475,45.911 85.961,46.425 85.961,46.569 85.663,46.867 84.129,46.867 83.748,47.248 D2.2 82.625,47.4 78.175,51.85 78.175,54.55 v2@78.275,54.55 ; U1.2 v2@78.275,54.55 ; v2@69.9,69.775 72.825,69.775 73.477,69.123 73.477,63.1
  Bottom Layer w0.254: v1(52.2,48.755) 52.2,47.6 52.287,47.513 v1(52.287,47.416) ; v1(74.075,56.95) 74.15,56.95 75.145,57.945 75.145,58.155 v1(75.1,58.2)
  Bottom Layer w0.508: v2(50.85,64.35) 53.578,67.078 54.478,67.078 v2(54.575,67.175) 54.524,67.226 54.524,68.699 55.881,70.056 v2(70.08,70.056) ; v2(54.55,45.025) 54.625,44.95 61.6,44.95 ; v2(61.575,40.7) 61.6,40.725 61.6,44.95 ; v2(64.525,47.225) 64.428,47.128 63.657,47.128 62.625,46.096 62.625,45.975 61.6,44.95 ; v2(74.9,51.475) 75.012,51.475 78.062,54.525 v2(78.175,54.525)
VIN: C2.1 C3.1 D1.1 U1.3 | length 14.5
  Top Layer w0.508: D1.1 80.044,68.55 81.754,68.55 82.052,68.252 C3.1 81.493,61.791 81.493,60.64 81.35,60.497 C2.1 81.35,57.629 82.129,56.85 U1.3
VINN: C1.1 D1.2 | length 7.3
  Top Layer w0.508: C1.1 86.25,68.175 D1.2
pads on no net: C1.2 C20.3 C20.4 C20.5 C20.6 C20.7 C20.8 C20.10 C20.11 C20.12 C20.14 RESET1.1 RESET1.3 SW1.2 SW1.4 U2.1 U2.2 U2.3 U2.4 U2.5 U2.7 U2.8 U2.9 U2.12 U2.13 U2.15 U2.16 U2.17 U2.18 U2.22 U2.23 U2.24 U2.25 U2.28 U2.29 U2.40 U2.41 U2.42 U2.43 U2.44 U2.51 U2.52 U2.55 U2.56 U2.59 U2.60 U2.61 U2.62 U2.63 U2.64 U2.65 U2.66 U2.67 U2.70 U2.71 U2.77 U2.78 U2.80 U2.81 U2.82 U2.83 U2.84 U2.85 U2.86 U2.91 U2.92 U2.93 U2.95 U2.96 U2.97 U2.98 UART1.1 UART1.6

## Polygon pours and split planes (outlines as drawn)
GND on Bottom Layer "GND_L02_P001" (solid, pour order 1): 23.05,90.975 23.05,36.2 88.85,36.2 88.85,90.975
GND on Top Layer "GND_L01_P000" (solid, remove dead copper, pour order 0): 23.05,90.975 23.05,36.2 88.85,36.2 88.85,90.975

## Silkscreen, mask and mechanical layers (free items; w line width, h text height)
Top Overlay:
  text "HUB-75 IN" at 33.9,76.2 h1
  text "HUB-75 OUT" at 61.175,74.925 h1.7
  text "STM32H750VIT6" at 39.725,58 h1
  text "Prosty Sterownik HUB-75  / Matrix LED RGB / Oparty o interfejs QSPI / Pr. Teodor Rosołowski / kont." at 31.05,37.075 h0.8
Milling:
  lines w0.254: 23.05,36.2 23.05,90.975 88.8,90.975 88.85,90.975 88.85,36.2 23.05,36.2

## Text inside footprints (layer, text, board x,y; h text height)
C7: Top Overlay "Pin do zew PCB" at 56.125,43.575 h0.7; Top Overlay "DAT1" at 57.27,38.8 h0.7 r90; Top Overlay "DAT0" at 58.395,38.7 h0.7 r90; Top Overlay "VSS" at 59.52,38.8 h0.7 r90; Top Overlay "CLK" at 60.62,38.8 h0.7 r90; Top Overlay "VDD" at 61.625,38.1 h0.7 r90; Top Overlay "CMD" at 62.87,38.875 h0.7 r90; Top Overlay "CD/DAT3" at 64.07,38.675 h0.7 r90; Top Overlay "DAT2" at 65.245,38.875 h0.7 r90
C10: Top Overlay "B2" at 70.74,79.5 h0.7; Top Overlay "A" at 75.365,80.85 h0.7; Top Overlay "C" at 76.165,79.625 h0.7; Top Overlay "CLK" at 78.665,80.875 h0.7; Top Overlay "GND" at 81.965,87.625 h0.7; Top Overlay "G1" at 60.79,87.9 h0.7; Top Overlay "LAT" at 78.865,86.975 h0.7; Top Overlay "D" at 77.015,88.85 h0.7; Top Overlay "B" at 75.065,87.125 h0.7; Top Overlay "GND" at 71.065,88.75 h0.7; Top Overlay "G2" at 69.015,87.125 h0.7; Top Overlay "GND" at 65.615,88.675 h0.7; Top Overlay "B1" at 66.215,79.875 h0.7; Top Overlay "R1" at 60.99,79.75 h0.7; Top Overlay "R2" at 68.565,80.775 h0.7; Top Overlay "OE" at 83.315,79.625 h0.7
C20: Top Overlay "B2" at 36.14,79.325 h0.7; Top Overlay "A" at 40.765,80.675 h0.7; Top Overlay "C" at 41.565,79.45 h0.7; Top Overlay "CLK" at 44.065,80.7 h0.7; Top Overlay "GND" at 47.365,87.45 h0.7; Top Overlay "G1" at 26.19,87.725 h0.7; Top Overlay "LAT" at 44.265,86.8 h0.7; Top Overlay "D" at 42.415,88.675 h0.7; Top Overlay "B" at 40.465,86.95 h0.7; Top Overlay "GND" at 36.465,88.575 h0.7; Top Overlay "G2" at 34.415,86.95 h0.7; Top Overlay "GND" at 31.015,88.5 h0.7; Top Overlay "B1" at 31.615,79.7 h0.7; Top Overlay "R1" at 26.39,79.575 h0.7; Top Overlay "R2" at 33.965,80.6 h0.7; Top Overlay "OE" at 48.715,79.45 h0.7
logo4: Top Overlay "TR" at 25.508,53.565 h1.27
logo5: Top Overlay "TR" at 33.305,69.416 h1.27
logo6: Bottom Overlay "TR" at 28.617,52.815 h1.27